# EAGLE board aquaPh (EAGLE 6.5.0)
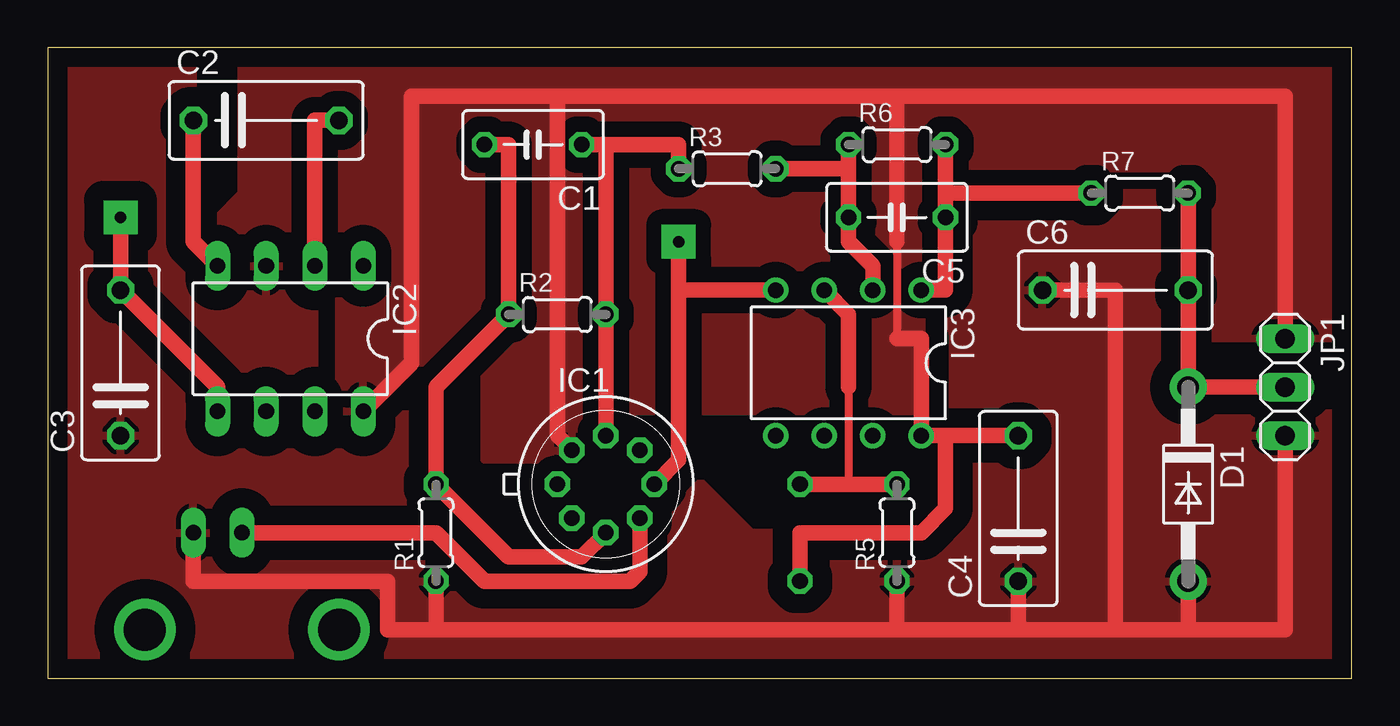
[diagram p0: board, top side]
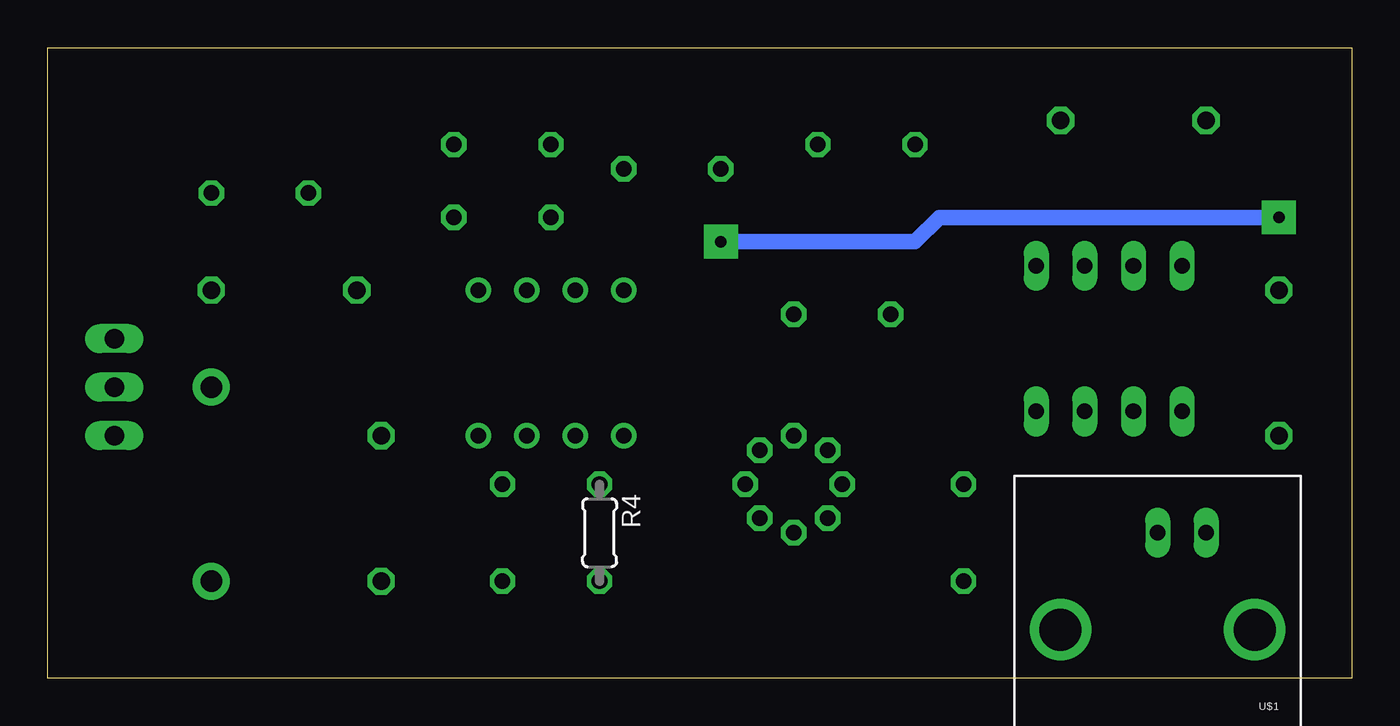
[diagram p1: board, bottom side, seen from below]

Size 68.25 x 33.01 mm. Coordinates in mm from the lower left corner, seen from the top.
Outline: 0,0 68.25,0 68.25,33.01 0,33.01 0,0
Copper layers (1*16): Top 0.035mm / dielectric 1.5mm / Bottom 0.035mm
Design rules "default": minimum track width 10mil, minimum drill 24mil, track to track 8mil, track to pad 8mil, pad to pad 8mil, via to via 8mil, smd to smd 8mil, copper to edge 40mil, drill to drill 8mil, minimum pad ring 10mil, minimum via ring 8mil, stop-mask expansion 4mil, vias tented up to drill 0mil, thermal gap 10mil

## Footprints (pad centres in the part's own frame; a part is rotated, then mirrored left to right if it is on the bottom)
C050-035X075 = drill 0.813 octagon: 1 -2.54,0; 2 2.54,0
C075-042X103 = drill 0.914 octagon: 1 -3.81,0; 2 3.81,0
DO41-10 = drill 1.118 pad 1.93: A 5.08,0; C -5.08,0
TO99 = drill 0.813 octagon: 1 -1.778,-1.778; 2 0,-2.54; 3 1.778,-1.778; 4 2.54,0; 5 1.778,1.778; 6 0,2.54; 7 -1.778,1.778; 8 -2.54,0
DIL08 = drill 0.813 long: 1 -3.81,-3.81; 2 -1.27,-3.81; 3 1.27,-3.81; 4 3.81,-3.81; 5 3.81,3.81; 6 1.27,3.81; 7 -1.27,3.81; 8 -3.81,3.81
DIL08' = drill 0.813 pad 1.27: 1 -3.81,-3.81; 2 -1.27,-3.81; 3 1.27,-3.81; 4 3.81,-3.81; 5 3.81,3.81; 6 1.27,3.81; 7 -1.27,3.81; 8 -3.81,3.81
1X03 = drill 1.016 long: 1 -2.54,0; 2 0,0; 3 2.54,0
0204/5 = drill 0.813 octagon: 1 -2.54,0; 2 2.54,0
BNC = drill 2.2: 3 -5.08,5.08; 4 5.08,5.08 | drill 0.8 long: GND -2.54,0; S 0,0

## Placement (x,y rotation side)
C1  1uF  [C050-035X075]  25.4,27.94 180 top
C2  10uF  [C075-042X103]  11.43,29.21 0 top
C3  10uF  [C075-042X103]  3.81,16.51 90 top
C4  470uF  [C075-042X103]  50.8,8.89 90 top
C5  1uF  [C050-035X075]  44.45,24.13 180 top
C6  10uF  [C075-042X103]  55.88,20.32 0 top
D1  1N4004  [DO41-10]  59.69,10.16 270 top
IC1  CA3140T  [TO99]  29.21,10.16 0 top
IC2  ICL7660CPA  [DIL08]  12.7,17.78 180 top
IC3  TL072P  [DIL08']  41.91,16.51 180 top
JP1  [1X03]  64.77,15.24 270 top
R1  33k  [0204/5]  20.32,7.62 90 top
R2  200k  [0204/5]  26.67,19.05 0 top
R3  10k  [0204/5]  35.56,26.67 0 top
R4  33k  [0204/5]  39.37,7.62 270 bottom
R5  10k  [0204/5]  44.45,7.62 90 top
R6  12k  [0204/5]  44.45,27.94 0 top
R7  4.7k  [0204/5]  57.15,25.4 0 top
U$1  BNCPTH  [BNC]  10.16,7.62 180 bottom

## Library data of the parts
C1-C6 R1-R7 = rcl
D1 = adafruit
IC1 IC3 = linear
IC2 = maxim; MF: INTERSIL; MPN: ICL7660CPA; OC_FARNELL: 1018170; OC_NEWARK: 06F7441
JP1 = pinhead
U$1 = SparkFun-Connectors

## Nets
-5V: C3.2 IC1.4 IC2.5 IC3.4
GND: C3.1 C4.1 C6.1 D1.A IC2.3 JP1.3 R1.1 R5.1 U$1.GND
N$1: IC1.3 U$1.S
N$2: C1.2 IC1.2 R1.2 R2.1
N$3: C2.1 IC2.4
N$4: C2.2 IC2.2
N$5: C1.1 IC1.6 R2.2 R3.1
N$6: C5.2 IC3.2 R3.2 R6.1
N$7: IC3.3 R4.1 R5.2
N$8: C5.1 IC3.1 R6.2 R7.1
N$9: C6.2 D1.C JP1.2 R7.2
VCC: C4.2 IC1.7 IC2.8 IC3.8 JP1.1 R4.2

## Tracks (layer width: path | path; a pad name or v marks a point on that pad's centre or on a via)
-5V  (via drill 0.6, 0.6 pad 1.78)
  Top 0.813: IC2.5 8.89,15.24 C3.2 v3.81,24.13 | 33.02,20.32 IC3.4 | IC1.4 33.02,11.43 33.02,20.32 | 33.02,20.32 v33.02,22.86
  Bottom 0.813: v3.81,24.13 21.59,24.13 22.86,22.86 v33.02,22.86
GND
  Top 0.813: 59.69,2.54 55.88,2.54 | 55.88,2.54 50.8,2.54 | 50.8,2.54 44.45,2.54 | 44.45,2.54 20.32,2.54 | 20.32,2.54 17.78,2.54 17.78,5.08 7.62,5.08 U$1.GND | C4.1 50.8,2.54 | D1.A 59.69,2.54 | C6.1 55.88,20.32 55.88,2.54 | R5.1 44.45,2.54 | R1.1 20.32,2.54 | JP1.3 64.77,2.54 59.69,2.54
  pour Top (isolate 1.016): 68.58,15.24 59.69,15.24 59.69,25.4 46.99,25.4 46.99,8.89 45.72,7.62 36.83,7.62 33.02,11.43 27.94,6.35 24.13,6.35 20.32,10.16 20.32,15.24 17.78,15.24 16.51,13.97 13.97,13.97 13.97,21.59 8.89,21.59 7.62,22.86 7.62,33.02 0,33.02 0,0 68.58,0
N$1
  Top 0.813: U$1.S 20.32,7.62 22.86,5.08 30.48,5.08 30.99,5.59 IC1.3
N$2
  Top 0.813: C1.2 24.13,27.94 R2.1 20.32,15.24 R1.2 24.13,6.35 27.94,6.35 IC1.2
N$3
  Top 0.813: C2.1 7.62,22.86 IC2.4
N$4
  Top 0.813: C2.2 13.97,29.21 IC2.2
N$5
  Top 0.813: R3.1 33.02,27.94 C1.1 29.21,27.94 R2.2 IC1.6
N$6
  Top 0.813: R3.2 41.91,26.67 | R6.1 41.91,26.67 | 41.91,26.67 C5.2 41.91,22.86 43.18,21.59 IC3.2
N$7
  Top 0.406: 41.91,15.24 41.91,10.16
  Top 0.813: R4.1 41.91,10.16 R5.2 | IC3.3 41.91,19.05 41.91,15.24
N$8
  Top 0.813: R7.1 46.99,25.4 C5.1 | R6.2 C5.1 | C5.1 46.99,20.32 IC3.1
N$9
  Top 0.813: R7.2 C6.2 D1.C JP1.2
VCC
  Top 0.406: 44.45,22.86 44.45,17.78
  Top 0.813: 44.45,30.48 44.45,22.86 | 46.99,12.7 IC3.8 45.72,17.78 44.45,17.78 | 46.99,12.7 C4.2 | IC2.8 19.05,16.51 19.05,30.48 26.67,30.48 | 26.67,30.48 44.45,30.48 | JP1.1 64.77,30.48 44.45,30.48 | R4.2 39.37,7.62 45.72,7.62 46.99,8.89 46.99,12.7 | IC1.7 26.67,12.7 26.67,30.48
  pour Top (isolate 0.813): 68.58,17.78 60.96,17.78 60.96,26.67 46.99,26.67 46.99,20.32 45.72,20.32 45.72,13.97 27.94,13.97 27.94,11.43 22.86,11.43 22.86,16.51 19.05,16.51 16.51,13.97 15.24,13.97 15.24,22.86 8.89,22.86 8.89,24.13 10.16,25.4 10.16,33.02 68.58,33.02